# EAGLE board 1,4_part_position (EAGLE 6.6.0)

Size 50 x 60 mm. Coordinates in mm from the lower left corner, seen from the top.
Outline: 0,0 50,0 50,60 0,60 0,0
Copper layers (1+2+3*14+15+16): Top 0.035mm / dielectric 0.2mm / VSS 0.035mm / dielectric 0.36mm / Route3 0.035mm / dielectric 0.28mm / Route14 0.035mm / dielectric 0.36mm / VCC 0.035mm / dielectric 0.2mm / Bottom 0.035mm
Design rules "PCB-POOL Standard_ML6 *": minimum track width 0.15mm, minimum drill 0.3mm, track to track 0.15mm, track to pad 0.15mm, pad to pad 0.15mm, via to via 0.15mm, smd to smd 0.15mm, copper to edge 0.3mm, drill to drill 0.2mm, minimum pad ring 0.2mm, minimum via ring 0.15mm, stop-mask expansion 0.075mm, vias tented up to drill 12mil, thermal gap 0.2mm

## Footprints (pad centres in the part's own frame; a part is rotated, then mirrored left to right if it is on the bottom)
C0603 = smd 1 x 0.8: 1 -0.85,0; 2 0.85,0
C0805 = smd 1.3 x 1.5: 1 -0.95,0; 2 0.95,0
LED0603 = smd 0.8 x 0.8: A 0.75,0; C -0.75,0
SG-3030 = smd 1.3 x 2.1: OUT 2.54,2.3; VCCA -2.54,2.3; VIO -2.54,-2.3; VSS 2.54,-2.3
JST-2-SMD = smd 3.5 x 1: 1 0.11,1; 2 0.11,-1
R0603 = smd 1 x 0.8: 1 -0.85,0; 2 0.85,0
0603-ARC = smd 0.5 x 0.75: 1 -1.2,-0.75; 2 -0.4,-0.75; 3 0.4,-0.75; 4 1.2,-0.75; 5 1.2,0.75; 6 0.4,0.75; 7 -0.4,0.75; 8 -1.2,0.75
SC70 = smd 0.5 x 0.7: A1 -0.65,-0.95; A2 0.65,-0.95; GND 0,-0.95; VCC 0,0.95; Y1 -0.65,0.95; Y2 0.65,0.95
SOT23-5 = smd 0.7 x 1: A -0.95,-1.3; B 0,-1.3; GND 0.95,-1.3; VCC -0.95,1.3; Y 0.95,1.3
PGA370(SMD)_COMPLETE = smd 0.8 x 0.8: A3 -20.32,22.86; A5 -17.78,22.86; A7 -15.24,22.86; A9 -12.7,22.86; A11 -10.16,22.86; A13 -7.62,22.86; A15 -5.08,22.86; A17 -2.54,22.86; A19 0,22.86; A21 2.54,22.86; A23 5.08,22.86; A25 7.62,22.86; A27 10.16,22.86; A29 12.7,22.86; A31 15.24,22.86; A33 17.78,22.86; A35 20.32,22.86; A37 22.86,22.86; AA1 -22.86,-7.62; AA3 -20.32,-7.62; AA5 -17.78,-7.62; AA33 17.78,-7.62; AA35 20.32,-7.62; AA37 22.86,-7.62; AB2 -21.59,-8.89; AB4 -19.05,-8.89; AB6 -16.51,-8.89; AB32 16.51,-8.89; AB34 19.05,-8.89; AB36 21.59,-8.89; AC1 -22.86,-10.16; AC3 -20.32,-10.16; AC5 -17.78,-10.16; AC33 17.78,-10.16; AC35 20.32,-10.16; AC37 22.86,-10.16; AD2 -21.59,-11.43; AD4 -19.05,-11.43; AD6 -16.51,-11.43; AD32 16.51,-11.43; AD34 19.05,-11.43; AD36 21.59,-11.43; AE1 -22.86,-12.7; AE3 -20.32,-12.7; AE5 -17.78,-12.7; AE33 17.78,-12.7; AE35 20.32,-12.7; AE37 22.86,-12.7; AF2 -21.59,-13.97; AF4 -19.05,-13.97; AF6 -16.51,-13.97; AF32 16.51,-13.97; AF34 19.05,-13.97; AF36 21.59,-13.97; AG1 -22.86,-15.24; AG3 -20.32,-15.24; AG5 -17.78,-15.24; AG33 17.78,-15.24; AG35 20.32,-15.24; AG37 22.86,-15.24; AH2 -21.59,-16.51; AH4 -19.05,-16.51; AH6 -16.51,-16.51; AH8 -13.97,-16.51; AH10 -11.43,-16.51; AH12 -8.89,-16.51; AH14 -6.35,-16.51; AH16 -3.81,-16.51; AH18 -1.27,-16.51; AH20 1.27,-16.51; AH22 3.81,-16.51; AH24 6.35,-16.51; AH26 8.89,-16.51; AH28 11.43,-16.51; AH30 13.97,-16.51; AH32 16.51,-16.51; AH34 19.05,-16.51; AH36 21.59,-16.51; AJ1 -22.86,-17.78; AJ3 -20.32,-17.78; AJ5 -17.78,-17.78; AJ7 -15.24,-17.78; AJ9 -12.7,-17.78; AJ11 -10.16,-17.78; AJ13 -7.62,-17.78; AJ15 -5.08,-17.78; AJ17 -2.54,-17.78; AJ19 0,-17.78; AJ21 2.54,-17.78; AJ23 5.08,-17.78; AJ25 7.62,-17.78; AJ27 10.16,-17.78; AJ29 12.7,-17.78; AJ31 15.24,-17.78; AJ33 17.78,-17.78; AJ35 20.32,-17.78; AJ37 22.86,-17.78; AK2 -21.59,-19.05; AK4 -19.05,-19.05; AK6 -16.51,-19.05; AK8 -13.97,-19.05; AK10 -11.43,-19.05; AK12 -8.89,-19.05; AK14 -6.35,-19.05; AK16 -3.81,-19.05; AK18 -1.27,-19.05; AK20 1.27,-19.05; AK22 3.81,-19.05; AK24 6.35,-19.05; AK26 8.89,-19.05; AK28 11.43,-19.05; AK30 13.97,-19.05; AK32 16.51,-19.05; AK34 19.05,-19.05; AK36 21.59,-19.05; AL1 -22.86,-20.32; AL3 -20.32,-20.32; AL5 -17.78,-20.32; AL7 -15.24,-20.32; AL9 -12.7,-20.32; AL11 -10.16,-20.32; AL13 -7.62,-20.32; AL15 -5.08,-20.32; AL17 -2.54,-20.32; AL19 0,-20.32; AL21 2.54,-20.32; AL23 5.08,-20.32; AL25 7.62,-20.32; AL27 10.16,-20.32; AL29 12.7,-20.32; AL31 15.24,-20.32; AL33 17.78,-20.32; AL35 20.32,-20.32; AL37 22.86,-20.32; AM2 -21.59,-21.59; AM4 -19.05,-21.59; AM6 -16.51,-21.59; AM8 -13.97,-21.59; AM10 -11.43,-21.59; AM12 -8.89,-21.59; AM14 -6.35,-21.59; AM16 -3.81,-21.59; AM18 -1.27,-21.59; AM20 1.27,-21.59; AM22 3.81,-21.59; AM24 6.35,-21.59; AM26 8.89,-21.59; AM28 11.43,-21.59; AM30 13.97,-21.59; AM32 16.51,-21.59; AM34 19.05,-21.59; AM36 21.59,-21.59; AN3 -20.32,-22.86; AN5 -17.78,-22.86; AN7 -15.24,-22.86; AN9 -12.7,-22.86; AN11 -10.16,-22.86; AN13 -7.62,-22.86; AN15 -5.08,-22.86; AN17 -2.54,-22.86; AN19 0,-22.86; AN21 2.54,-22.86; AN23 5.08,-22.86; AN25 7.62,-22.86; AN27 10.16,-22.86; AN29 12.7,-22.86; AN31 15.24,-22.86; AN33 17.78,-22.86; AN35 20.32,-22.86; AN37 22.86,-22.86; B2 -21.59,21.59; B4 -19.05,21.59; B6 -16.51,21.59; B8 -13.97,21.59; B10 -11.43,21.59; B12 -8.89,21.59; B14 -6.35,21.59; B16 -3.81,21.59; B18 -1.27,21.59; B20 1.27,21.59; B22 3.81,21.59; B24 6.35,21.59; B26 8.89,21.59; B28 11.43,21.59; B30 13.97,21.59; B32 16.51,21.59; B34 19.05,21.59; B36 21.59,21.59; C1 -22.86,20.32; C3 -20.32,20.32; C5 -17.78,20.32; C7 -15.24,20.32; C9 -12.7,20.32; C11 -10.16,20.32; C13 -7.62,20.32; C15 -5.08,20.32; C17 -2.54,20.32; C19 0,20.32; C21 2.54,20.32; C23 5.08,20.32; C25 7.62,20.32; C27 10.16,20.32; C29 12.7,20.32; C31 15.24,20.32; C33 17.78,20.32; C35 20.32,20.32; C37 22.86,20.32; D2 -21.59,19.05; D4 -19.05,19.05; D6 -16.51,19.05; D8 -13.97,19.05; D10 -11.43,19.05; D12 -8.89,19.05; D14 -6.35,19.05; D16 -3.81,19.05; D18 -1.27,19.05; D20 1.27,19.05; D22 3.81,19.05; D24 6.35,19.05; D26 8.89,19.05; D28 11.43,19.05; D30 13.97,19.05; D32 16.51,19.05; D34 19.05,19.05; D36 21.59,19.05; E1 -22.86,17.78; E3 -20.32,17.78; E5 -17.78,17.78; E7 -15.24,17.78; E9 -12.7,17.78; E11 -10.16,17.78; E13 -7.62,17.78; E15 -5.08,17.78; E17 -2.54,17.78; E19 0,17.78; E21 2.54,17.78; E23 5.08,17.78; E25 7.62,17.78; E27 10.16,17.78; E29 12.7,17.78; E31 15.24,17.78; E33 17.78,17.78; E35 20.32,17.78; E37 22.86,17.78; F2 -21.59,16.51; F4 -19.05,16.51; F6 -16.51,16.51; F8 -13.97,16.51; F10 -11.43,16.51; F12 -8.89,16.51; F14 -6.35,16.51; F16 -3.81,16.51; F18 -1.27,16.51; F20 1.27,16.51; F22 3.81,16.51; F24 6.35,16.51; F26 8.89,16.51; F28 11.43,16.51; F30 13.97,16.51; F32 16.51,16.51; F34 19.05,16.51; F36 21.59,16.51; G1 -22.86,15.24; G3 -20.32,15.24; G5 -17.78,15.24; G33 17.78,15.24; G35 20.32,15.24; G37 22.86,15.24; H2 -21.59,13.97; H4 -19.05,13.97; H6 -16.51,13.97; H32 16.51,13.97; H34 19.05,13.97; H36 21.59,13.97; J1 -22.86,12.7; J3 -20.32,12.7; J5 -17.78,12.7; J33 17.78,12.7; J35 20.32,12.7; J37 22.86,12.7; K2 -21.59,11.43; K4 -19.05,11.43; K6 -16.51,11.43; K32 16.51,11.43; K34 19.05,11.43; K36 21.59,11.43; L1 -22.86,10.16; L3 -20.32,10.16; L5 -17.78,10.16; L33 17.78,10.16; L35 20.32,10.16; L37 22.86,10.16; M2 -21.59,8.89; M4 -19.05,8.89; M6 -16.51,8.89; M32 16.51,8.89; M34 19.05,8.89; M36 21.59,8.89; N1 -22.86,7.62; N3 -20.32,7.62; N5 -17.78,7.62; N33 17.78,7.62; N35 20.32,7.62; N37 22.86,7.62; P2 -21.59,6.35; P4 -19.05,6.35; P6 -16.51,6.35; P32 16.51,6.35; P34 19.05,6.35; P36 21.59,6.35; Q1 -22.86,5.08; Q3 -20.32,5.08; Q5 -17.78,5.08; Q33 17.78,5.08; Q35 20.32,5.08; Q37 22.86,5.08; R2 -21.59,3.81; R4 -19.05,3.81; R6 -16.51,3.81; R32 16.51,3.81; R34 19.05,3.81; R36 21.59,3.81; S1 -22.86,2.54; S3 -20.32,2.54; S5 -17.78,2.54; S33 17.78,2.54; S35 20.32,2.54; S37 22.86,2.54; T2 -21.59,1.27; T4 -19.05,1.27; T6 -16.51,1.27; T32 16.51,1.27; T34 19.05,1.27; T36 21.59,1.27; U1 -22.86,0; U3 -20.32,0; U5 -17.78,0; U33 17.78,0; U35 20.32,0; U37 22.86,0; V2 -21.59,-1.27; V4 -19.05,-1.27; V6 -16.51,-1.27; V32 16.51,-1.27; V34 19.05,-1.27; V36 21.59,-1.27; W1 -22.86,-2.54; W3 -20.32,-2.54; W5 -17.78,-2.54; W33 17.78,-2.54; W35 20.32,-2.54; W37 22.86,-2.54; X2 -21.59,-3.81; X4 -19.05,-3.81; X6 -16.51,-3.81; X32 16.51,-3.81; X34 19.05,-3.81; X36 21.59,-3.81; Y1 -22.86,-5.08; Y3 -20.32,-5.08; Y5 -17.78,-5.08; Y33 17.78,-5.08; Y35 20.32,-5.08; Y37 22.86,-5.08; Z2 -21.59,-6.35; Z4 -19.05,-6.35; Z6 -16.51,-6.35; Z32 16.51,-6.35; Z34 19.05,-6.35; Z36 21.59,-6.35
BGA495_NO_THERMALS = smd 0.5 x 0.5: A2 13.97,-11.43; A3 13.97,-10.16; A4 13.97,-8.89; A5 13.97,-7.62; A6 13.97,-6.35; A7 13.97,-5.08; A8 13.97,-3.81; A9 13.97,-2.54; A12 13.97,1.27; A13 13.97,2.54; A14 13.97,3.81; A15 13.97,5.08; A16 13.97,6.35; A17 13.97,7.62; A18 13.97,8.89; A19 13.97,10.16; A20 13.97,11.43; A21 13.97,12.7; AA1 -11.43,-12.7; AA2 -11.43,-11.43; AA3 -11.43,-10.16; AA4 -11.43,-8.89; AA5 -11.43,-7.62; AA6 -11.43,-6.35; AA7 -11.43,-5.08; AA8 -11.43,-3.81; AA9 -11.43,-2.54; AA10 -11.43,-1.27; AA11 -11.43,0; AA12 -11.43,1.27; AA13 -11.43,2.54; AA14 -11.43,3.81; AA15 -11.43,5.08; AA16 -11.43,6.35; AA17 -11.43,7.62; AA18 -11.43,8.89; AA19 -11.43,10.16; AA20 -11.43,11.43; AA21 -11.43,12.7; AB1 -12.7,-12.7; AB2 -12.7,-11.43; AB3 -12.7,-10.16; AB4 -12.7,-8.89; AB5 -12.7,-7.62; AB6 -12.7,-6.35; AB7 -12.7,-5.08; AB8 -12.7,-3.81; AB9 -12.7,-2.54; AB10 -12.7,-1.27; AB11 -12.7,0; AB12 -12.7,1.27; AB13 -12.7,2.54; AB14 -12.7,3.81; AB15 -12.7,5.08; AB16 -12.7,6.35; AB17 -12.7,7.62; AB18 -12.7,8.89; AB19 -12.7,10.16; AB20 -12.7,11.43; AB21 -12.7,12.7; AC1 -13.97,-12.7; AC2 -13.97,-11.43; AC3 -13.97,-10.16; AC4 -13.97,-8.89; AC5 -13.97,-7.62; AC6 -13.97,-6.35; AC7 -13.97,-5.08; AC8 -13.97,-3.81; AC9 -13.97,-2.54; AC10 -13.97,-1.27; AC11 -13.97,0; AC12 -13.97,1.27; AC13 -13.97,2.54; AC14 -13.97,3.81; AC15 -13.97,5.08; AC16 -13.97,6.35; AC17 -13.97,7.62; AC18 -13.97,8.89; AC19 -13.97,10.16; AC20 -13.97,11.43; AC21 -13.97,12.7; AD1 -15.24,-12.7; AD2 -15.24,-11.43; AD3 -15.24,-10.16; AD4 -15.24,-8.89; AD5 -15.24,-7.62; AD6 -15.24,-6.35; AD7 -15.24,-5.08; AD8 -15.24,-3.81; AD9 -15.24,-2.54; AD10 -15.24,-1.27; AD13 -15.24,2.54; AD14 -15.24,3.81; AD15 -15.24,5.08; AD16 -15.24,6.35; AD17 -15.24,7.62; AD18 -15.24,8.89; AD19 -15.24,10.16; AD20 -15.24,11.43; AD21 -15.24,12.7; B1 12.7,-12.7; B2 12.7,-11.43; B3 12.7,-10.16; B4 12.7,-8.89; B5 12.7,-7.62; B6 12.7,-6.35; B7 12.7,-5.08; B8 12.7,-3.81; B9 12.7,-2.54; B10 12.7,-1.27; B11 12.7,0; B12 12.7,1.27; B13 12.7,2.54; B14 12.7,3.81; B15 12.7,5.08; B16 12.7,6.35; B17 12.7,7.62; B18 12.7,8.89; B19 12.7,10.16; B20 12.7,11.43; B21 12.7,12.7; C1 11.43,-12.7; C2 11.43,-11.43; C3 11.43,-10.16; C4 11.43,-8.89; C5 11.43,-7.62; C6 11.43,-6.35; C7 11.43,-5.08; C8 11.43,-3.81; C9 11.43,-2.54; C10 11.43,-1.27; C11 11.43,0; C12 11.43,1.27; C13 11.43,2.54; C14 11.43,3.81; C15 11.43,5.08; C16 11.43,6.35; C17 11.43,7.62; C18 11.43,8.89; C19 11.43,10.16; C20 11.43,11.43; C21 11.43,12.7; D1 10.16,-12.7; D2 10.16,-11.43; D3 10.16,-10.16; D4 10.16,-8.89; D5 10.16,-7.62; D6 10.16,-6.35; D7 10.16,-5.08; D8 10.16,-3.81; D9 10.16,-2.54; D10 10.16,-1.27; D11 10.16,0; D12 10.16,1.27; D13 10.16,2.54; D14 10.16,3.81; D15 10.16,5.08; D16 10.16,6.35; D17 10.16,7.62; D18 10.16,8.89; D19 10.16,10.16; D20 10.16,11.43; D21 10.16,12.7; E1 8.89,-12.7; E2 8.89,-11.43; E3 8.89,-10.16; E4 8.89,-8.89; E5 8.89,-7.62; E6 8.89,-6.35; E7 8.89,-5.08; E8 8.89,-3.81; E9 8.89,-2.54; E10 8.89,-1.27; E11 8.89,0; E12 8.89,1.27; E13 8.89,2.54; E14 8.89,3.81; E15 8.89,5.08; E16 8.89,6.35; E17 8.89,7.62; E18 8.89,8.89; E19 8.89,10.16; E20 8.89,11.43; E21 8.89,12.7; F1 7.62,-12.7; F2 7.62,-11.43; F3 7.62,-10.16; F4 7.62,-8.89; F5 7.62,-7.62; F6 7.62,-6.35; F7 7.62,-5.08; F8 7.62,-3.81; F9 7.62,-2.54; F10 7.62,-1.27; F11 7.62,0; F12 7.62,1.27; F13 7.62,2.54; F14 7.62,3.81; F15 7.62,5.08; F16 7.62,6.35; F17 7.62,7.62; F18 7.62,8.89; F19 7.62,10.16; F20 7.62,11.43; F21 7.62,12.7; G1 6.35,-12.7; G2 6.35,-11.43; G3 6.35,-10.16; G4 6.35,-8.89; G5 6.35,-7.62; G6 6.35,-6.35; G7 6.35,-5.08; G8 6.35,-3.81; G9 6.35,-2.54; G10 6.35,-1.27; G11 6.35,0; G12 6.35,1.27; G13 6.35,2.54; G14 6.35,3.81; G15 6.35,5.08; G16 6.35,6.35; G17 6.35,7.62; G18 6.35,8.89; G19 6.35,10.16; G20 6.35,11.43; G21 6.35,12.7; H1 5.08,-12.7; H2 5.08,-11.43; H3 5.08,-10.16; H4 5.08,-8.89; H5 5.08,-7.62; H6 5.08,-6.35; H7 5.08,-5.08; H8 5.08,-3.81; H9 5.08,-2.54; H10 5.08,-1.27; H11 5.08,0; H12 5.08,1.27; H13 5.08,2.54; H14 5.08,3.81; H15 5.08,5.08; H16 5.08,6.35; H17 5.08,7.62; H18 5.08,8.89; H19 5.08,10.16; H20 5.08,11.43; H21 5.08,12.7; J1 3.81,-12.7; J2 3.81,-11.43; J3 3.81,-10.16; J4 3.81,-8.89; J5 3.81,-7.62; J6 3.81,-6.35; J7 3.81,-5.08; J8 3.81,-3.81; J9 3.81,-2.54; J10 3.81,-1.27; J11 3.81,0; J12 3.81,1.27; J13 3.81,2.54; J14 3.81,3.81; J15 3.81,5.08; J16 3.81,6.35; J17 3.81,7.62; J18 3.81,8.89; J19 3.81,10.16; J20 3.81,11.43; J21 3.81,12.7; K1 2.54,-12.7; K2 2.54,-11.43; K3 2.54,-10.16; K4 2.54,-8.89; K5 2.54,-7.62; K6 2.54,-6.35; K7 2.54,-5.08; K8 2.54,-3.81; K9 2.54,-2.54; K10 2.54,-1.27; K11 2.54,0; K12 2.54,1.27; K13 2.54,2.54; K14 2.54,3.81; K15 2.54,5.08; K16 2.54,6.35; K17 2.54,7.62; K18 2.54,8.89; K19 2.54,10.16; K20 2.54,11.43; K21 2.54,12.7; L1 1.27,-12.7; L2 1.27,-11.43; L3 1.27,-10.16; L4 1.27,-8.89; L5 1.27,-7.62; L6 1.27,-6.35; L7 1.27,-5.08; L8 1.27,-3.81; L9 1.27,-2.54; L10 1.27,-1.27; L11 1.27,0; L12 1.27,1.27; L13 1.27,2.54; L14 1.27,3.81; L15 1.27,5.08; L16 1.27,6.35; L17 1.27,7.62; L18 1.27,8.89; L19 1.27,10.16; L20 1.27,11.43; L21 1.27,12.7; M2 0,-11.43; M3 0,-10.16; M4 0,-8.89; M5 0,-7.62; M6 0,-6.35; M7 0,-5.08; M8 0,-3.81; M9 0,-2.54; M10 0,-1.27; M11 0,0; M12 0,1.27; M13 0,2.54; M14 0,3.81; M15 0,5.08; M16 0,6.35; M17 0,7.62; M18 0,8.89; M19 0,10.16; M20 0,11.43; N2 -1.27,-11.43; N3 -1.27,-10.16; N4 -1.27,-8.89; N5 -1.27,-7.62; N6 -1.27,-6.35; N7 -1.27,-5.08; N8 -1.27,-3.81; N9 -1.27,-2.54; N10 -1.27,-1.27; N11 -1.27,0; N12 -1.27,1.27; N13 -1.27,2.54; N14 -1.27,3.81; N15 -1.27,5.08; N16 -1.27,6.35; N17 -1.27,7.62; N18 -1.27,8.89; N19 -1.27,10.16; N20 -1.27,11.43; P1 -2.54,-12.7; P2 -2.54,-11.43; P3 -2.54,-10.16; P4 -2.54,-8.89; P5 -2.54,-7.62; P6 -2.54,-6.35; P7 -2.54,-5.08; P8 -2.54,-3.81; P9 -2.54,-2.54; P10 -2.54,-1.27; P11 -2.54,0; P12 -2.54,1.27; P13 -2.54,2.54; P14 -2.54,3.81; P15 -2.54,5.08; P16 -2.54,6.35; P17 -2.54,7.62; P18 -2.54,8.89; P19 -2.54,10.16; P20 -2.54,11.43; P21 -2.54,12.7; R1 -3.81,-12.7; R2 -3.81,-11.43; R3 -3.81,-10.16; R4 -3.81,-8.89; R5 -3.81,-7.62; R6 -3.81,-6.35; R7 -3.81,-5.08; R8 -3.81,-3.81; R9 -3.81,-2.54; R10 -3.81,-1.27; R11 -3.81,0; R12 -3.81,1.27; R13 -3.81,2.54; R14 -3.81,3.81; R15 -3.81,5.08; R16 -3.81,6.35; R17 -3.81,7.62; R18 -3.81,8.89; R19 -3.81,10.16; R20 -3.81,11.43; R21 -3.81,12.7; T1 -5.08,-12.7; T2 -5.08,-11.43; T3 -5.08,-10.16; T4 -5.08,-8.89; T5 -5.08,-7.62; T6 -5.08,-6.35; T7 -5.08,-5.08; T8 -5.08,-3.81; T9 -5.08,-2.54; T10 -5.08,-1.27; T11 -5.08,0; T12 -5.08,1.27; T13 -5.08,2.54; T14 -5.08,3.81; T15 -5.08,5.08; T16 -5.08,6.35; T17 -5.08,7.62; T18 -5.08,8.89; T19 -5.08,10.16; T20 -5.08,11.43; T21 -5.08,12.7; U1 -6.35,-12.7; U2 -6.35,-11.43; U3 -6.35,-10.16; U4 -6.35,-8.89; U5 -6.35,-7.62; U6 -6.35,-6.35; U7 -6.35,-5.08; U8 -6.35,-3.81; U9 -6.35,-2.54; U10 -6.35,-1.27; U11 -6.35,0; U12 -6.35,1.27; U13 -6.35,2.54; U14 -6.35,3.81; U15 -6.35,5.08; U16 -6.35,6.35; U17 -6.35,7.62; U18 -6.35,8.89; U19 -6.35,10.16; U20 -6.35,11.43; U21 -6.35,12.7; V1 -7.62,-12.7; V2 -7.62,-11.43; V3 -7.62,-10.16; V4 -7.62,-8.89; V5 -7.62,-7.62; V6 -7.62,-6.35; V7 -7.62,-5.08; V8 -7.62,-3.81; V9 -7.62,-2.54; V10 -7.62,-1.27; V11 -7.62,0; V12 -7.62,1.27; V13 -7.62,2.54; V14 -7.62,3.81; V15 -7.62,5.08; V16 -7.62,6.35; V17 -7.62,7.62; V18 -7.62,8.89; V19 -7.62,10.16; V20 -7.62,11.43; V21 -7.62,12.7; W1 -8.89,-12.7; W2 -8.89,-11.43; W3 -8.89,-10.16; W4 -8.89,-8.89; W5 -8.89,-7.62; W6 -8.89,-6.35; W7 -8.89,-5.08; W8 -8.89,-3.81; W9 -8.89,-2.54; W10 -8.89,-1.27; W11 -8.89,0; W12 -8.89,1.27; W13 -8.89,2.54; W14 -8.89,3.81; W15 -8.89,5.08; W16 -8.89,6.35; W17 -8.89,7.62; W18 -8.89,8.89; W19 -8.89,10.16; W20 -8.89,11.43; W21 -8.89,12.7; Y1 -10.16,-12.7; Y2 -10.16,-11.43; Y3 -10.16,-10.16; Y4 -10.16,-8.89; Y5 -10.16,-7.62; Y6 -10.16,-6.35; Y7 -10.16,-5.08; Y8 -10.16,-3.81; Y9 -10.16,-2.54; Y10 -10.16,-1.27; Y11 -10.16,0; Y12 -10.16,1.27; Y13 -10.16,2.54; Y14 -10.16,3.81; Y15 -10.16,5.08; Y16 -10.16,6.35; Y17 -10.16,7.62; Y18 -10.16,8.89; Y19 -10.16,10.16; Y20 -10.16,11.43; Y21 -10.16,12.7

## Placement (x,y rotation side)
C1  150nF  [C0603]  19.91,58.22 0 top
C2  150nF  [C0603]  17.3,57.26 90 top
C3  10pF  [C0603]  19.87,56.21 0 top
C4  10pF  [C0603]  33.58,56.79 0 top
C5  1nF  [C0603]  39.21,56.06 90 top
C6  150nF  [C0603]  12.72,55.24 90 top
C7  10uF  [C0805]  14.65,55.2 90 top
C8  150nF  [C0603]  33.04,53.96 90 top
C9  150nF  [C0603]  12.7,38.25 0 top
C10  150nF  [C0603]  18.93,37.99 90 top
C11  150nF  [C0603]  24.11,37.84 90 top
C12  150nF  [C0603]  37.1,37.67 90 top
C13  150nF  [C0603]  38.62,37.65 90 top
C14  4,7uF  [C0805]  15.6,37.44 90 top
C15  4,7uF  [C0805]  21.94,37.46 90 top
C16  4,7uF  [C0805]  28.55,37.46 90 top
C17  4,7uF  [C0805]  35.06,37.56 90 top
C18  150nF  [C0603]  12.7,36.5 0 top
C19  4,7uF  [C0805]  12.89,32.72 0 top
C20  4,7uF  [C0805]  37.15,30.67 0 top
C21  150nF  [C0603]  12.52,30.37 0 top
C22  150nF  [C0603]  37.35,28.87 0 top
C23  4,7uF  [C0805]  12.98,27.47 0 top
C24  150nF  [C0603]  36.56,25.82 90 top
C25  150nF  [C0603]  26.25,25.73 90 top
C26  150nF  [C0603]  28.86,25.71 90 top
C27  150nF  [C0603]  32.56,25.72 90 top
C28  150nF  [C0603]  38.29,25.8 90 top
C29  150nF  [C0603]  12.58,22.85 0 top
C30  150nF  [C0603]  27.88,20.79 90 top
C31  150nF  [C0603]  35.47,20.79 90 top
C32  150nF  [C0603]  22.33,20.19 0 top
C33  4,7uF  [C0805]  31.58,20.54 90 top
C34  4,7uF  [C0805]  12.77,19.04 0 top
C35  150nF  [C0603]  12.77,16.77 0 top
C36  150nF  [C0603]  38.9,16.68 90 top
C37  4,7uF  [C0805]  35.31,16.27 0 top
C38  4,7uF  [C0805]  28.01,16.13 0 top
C39  150nF  [C0603]  22.33,15.3 0 top
C40  150nF  [C0603]  12.79,14.12 0 top
C41  150nF  [C0603]  37.96,13.02 90 top
C42  4,7uF  [C0805]  31.7,12.87 90 top
C43  150nF  [C0603]  27.63,12.56 90 top
C44  150nF  [C0603]  35.31,12.58 90 top
C45  1uF  [C0603]  12.46,11.32 0 top
C46  150nF  [C0603]  22.32,11.43 0 top
LED1  Grün  [LED0603]  41.08,53.15 180 top
OSC1  SG3030B  [SG-3030]  26.97,55.28 0 top
POWER_CON  M02  [JST-2-SMD]  9.76,55.26 0 top
R1  33 Ohm  [R0603]  33.6,58.13 0 top
R2  1K Ohm  [R0603]  36.89,56.73 0 top
R3  330 Ohm  [R0603]  28.71,29.69 90 top
R4  470 Ohm  [R0603]  37.82,53.93 90 top
R5  15 Ohm  [R0603]  38.63,33.85 90 top
R6  0 Ohm  [R0603]  12.57,21.46 0 top
R7  100 Ohm  [R0603]  12.77,15.46 0 top
R8  1K Ohm  [R0603]  12.42,12.65 0 top
RN1  1K Ohm  [0603-ARC]  31.78,37.43 0 top
SWITCH_CON  M02  [JST-2-SMD]  42.42,56.12 0 top
U1  NC7WZ07  [SC70]  18.14,53.93 0 top
U2  NC7SZ32  [SOT23-5]  35.34,53.91 0 top
U3  PGA370_COMPLETE  [PGA370(SMD)_COMPLETE]  25.23,25.06 0 top
U4  BGA495_NT  [BGA495_NO_THERMALS]  31.04,15.55 0 bottom

## Library data of the parts
C1-C46 LED1 OSC1 POWER_CON R1-R8 RN1 SWITCH_CON U1-U4 = 1.4ghz-lib

## Nets
VCCA: OSC1.VCCA
VSS: OSC1.VSS